# Altium PCB SIM548z v4.PcbDoc
Units mil, origin at the board's own origin, x right, y up, seen from the top; angles counter-clockwise.
Board outline 23450 x 13790 mil, 2 copper layers (Top Layer, Bottom Layer); 49 components, 0 nets, 375 pads, 39 vias.
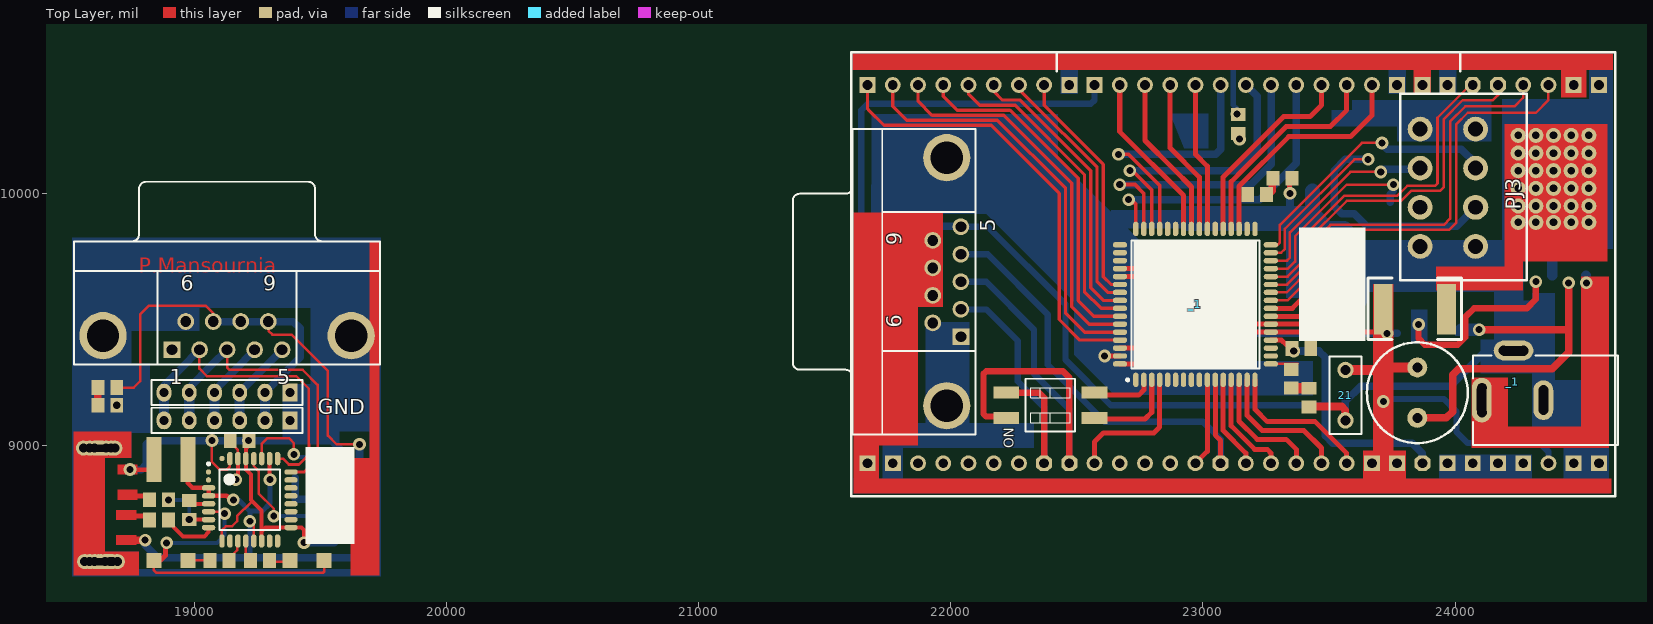
[diagram p0: Top Layer view]
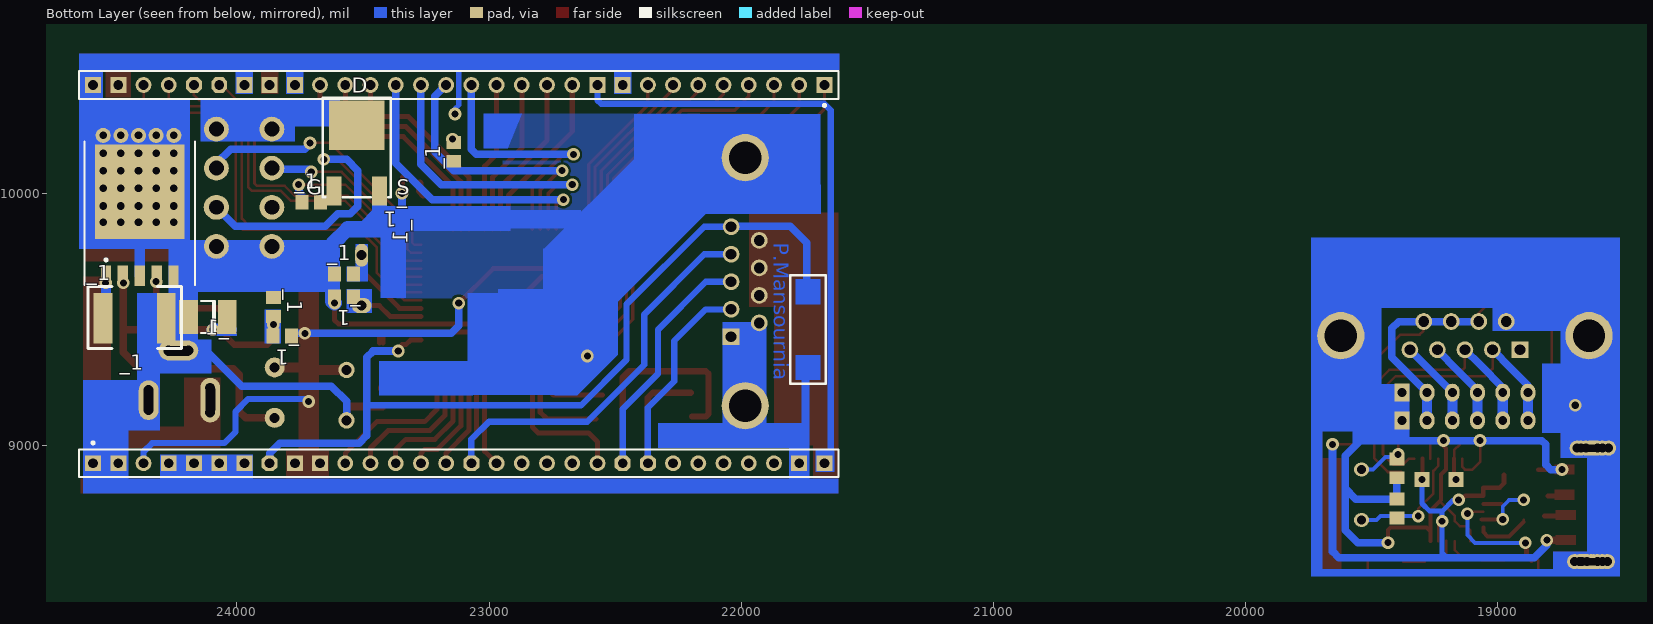
[diagram p1: Bottom Layer view, seen from below]

## Layer stack, top to bottom
Top Layer: signal copper 1.4
Dielectric: dielectric 12.6, FR-4, Dk 4.8
Bottom Layer: signal copper 1.4

## Board outline
8200,14815 31650,14815 31650,1055 31620,1025 31510,1135 8230,1135

## Design rules (kind name [scope] priority, off if disabled: settings)
Clearance [All] p1: gap=10
PolygonConnect [All] p1: connectstyle=Relief reliefconductorwidth=10 reliefentries=4 polygonreliefangle="90 Angle"
RoutingVias [All] p1: holewidth=28 width=50 viastyle="Through Hole" minholewidth=28 minwidth=50 maxholewidth=28 maxwidth=50
SilkscreenOverComponentPads [All] p1: minsilkscreentomaskgap=10
SolderMaskExpansion [All] p1: expansion=4
Width [All] p1: maxlimit=10 minlimit=10 preferedwidth=10
27 further rules are at their usual default settings.

## Components (designator, comment, footprint, x,y, rotation, side; value= is the part's Value field where it differs from the comment)
21 "Comment" VP45-3.2 23565,9200 r90 top
_1 "Comment" 2012[0805] 23820,9435 r180 bottom
_1 "Comment" 2012[0805] 23855,9550 r270 bottom
_1 "Comment" ATMEGA128 22970,9540 r90 top
_1 "Comment" KLD-0202 24645,9180 r180 top
_1 "Comment" 2220 24280,9505 r0 bottom
_1 "Comment" 1812 24115,9510 r0 bottom
_1 "Comment" 2012[0805] 23575,9680 r180 bottom
_1 "Comment" 2012[0805] 23575,9590 r180 bottom
_1 "Comment" 2012[0805] 23140,10165 r270 bottom
_1 "Comment" DPAK 23515,10210 r180 bottom
_1 "Comment" 2012[0805] 23705,9965 r0 bottom
PJ3 "PowerCon8" HDRB2*4 24081.22,10255 r270 top
? "Comment" klid_smd 21725,9485 r270 bottom
? "Comment" "dip switch" 22400,9200 r90 top
? "Comment" PROG 19410,9100 r180 top
? "Comment" PROG 19410,9210 r180 top
? "Comment" DSUB1.385-2H9 19130,9810 r0 top
? "Comment" 2012[0805] 23420,9190 r90 top
? "Comment" 2012[0805] 23350,9265 r90 top
? "Comment" LM2576 24385,9840 r180 bottom
? "Comment" HDR1X30#1 21670,10430 r0 bottom
? "Comment" 100uH 23850,9210 r90 top
? "Comment" 2220 23965,9540 r180 top
? "Comment" 2012[0805] 23390,9385 r0 top
? "Comment" X2P 23505,9655 r270 top
? "Comment" 2012[0805] 23140,10275 r90 top
? "Comment" DSUB1.385-2H9 21610,9650 r90 top
? "Comment" HDR1X30#2 24570,8930 r180 bottom
? "Comment" 2012[0805] 23215,9995 r180 top
? "Comment" 2012[0805] 23315,10060 r180 top
? "" 32A_L 19220,8785 r0 top
? "" 2012[0805] 18860,8785 r0 top
? "" 2012[0805] 18860,8705 r0 top
? "" 2012[0805] 18980,8745 r90 top
? "" 2012[0805] 19180,9020 r0 top
? "" RAD-0.2 19540,8805 r270 top
? "" 1206 18840,8545 r0 top
? "" 1206 19380,8545 r0 top
? "" 2012[0805] 19100,8545 r0 top
? "" 2012[0805] 19260,8545 r0 top
? "" 1206 18840,8885 r0 top
? "" 1206 18840,8945 r0 top
? "" 1206 18840,9005 r0 top
? "" 1206 19165,8865 r0 bottom
? "" 2012[0805] 19400,8910 r270 bottom
? "" 2012[0805] 19400,8750 r270 bottom
? "Comment" 2012[0805] 18655,9160 r0 top
? "Comment" 2012[0805] 18655,9230 r0 top

## Footprints (in the part's own frame and the unit in brackets; to place one, negate y for a bottom-side part, rotate by r counter-clockwise, add the part's x,y. Pads: shape width x height; smd on the part's side, far side on the other; paste and mask are expansions set on the pad)
32A_L [mm] "Thin QFP, 32-Leads, Body 7x7mm, Pitch 0.8mm, IPC High Density"
  oval 0.508x0.55 smd: 1(-4.15,2.8) 2(-4.15,2)
  oval 1.35x0.55 smd: 3(-4.15,1.2) 4(-4.15,0.4) 5(-4.15,-0.4) 6(-4.15,-1.2) 7(-4.15,-2) 8(-4.15,-2.8) 17(4.15,-2.8) 18(4.15,-2) 19(4.15,-1.2) 20(4.15,-0.4) 21(4.15,0.4) 22(4.15,1.2) 23(4.15,2) 24(4.15,2.8)
  oval 0.55x1.35 smd: 9(-2.8,-4.15) 10(-2,-4.15) 11(-1.2,-4.15) 12(-0.4,-4.15) 13(0.4,-4.15) 14(1.2,-4.15) 15(2,-4.15) 16(2.8,-4.15) 25(2.8,4.15) 26(2,4.15) 27(1.2,4.15) 28(0.4,4.15) 29(-0.4,4.15) 30(-1.2,4.15) 31(-2,4.15)
  oval 0.55x0.508 smd: 32(-2.8,4.15)
  silkscreen extent -4.27,-3.05 3.05,3.75, body extent -3.5,-3.5 3.5,3.5, height 1.2
100uH [mm]
  round 2 hole 1: 2(2.54,0) VCC(-2.54,0)
  silkscreen extent -5.08,-5.08 5.08,5.08
1206 [mil]
  rect 60x60 smd: 1(0,0) 2(135,0)
1812 [mm] "Chip Capacitor; Body 4.5 x 3.2 mm (LxW typ)"
  rect 1.9x3.4 smd: 1(-1.95,0) 2(1.95,0)
  silkscreen extent -0.7,-1.6 0.7,1.6
2012[0805] [mm] "Chip Resistor; Body 2.0 x 1.3 mm (LxW typ)"
  rect 1.3x1.5 smd: 1(-0.95,0) 2(0.95,0)
2220 [mil]
  rect 75x200 smd: GND(0,0) VCC(250,0)
  silkscreen extent -60,-125 310,120
ATMEGA128 [mm] "mega128-64"
  oval 1.45x0.55 smd: 1PIN(-7.092,6) 2(-7.092,5.2) 3(-7.092,4.4) 4(-7.092,3.6) 5(-7.092,2.8) 6(-7.092,2) 7(-7.092,1.2) 8(-7.092,0.4) 9(-7.092,-0.4) 10(-7.092,-1.2) 11(-7.092,-2) 12(-7.092,-2.8) 13(-7.092,-3.6) 14(-7.092,-4.4) 15(-7.092,-5.2) 16(-7.092,-6) 33(8.108,-6) 34(8.108,-5.2) 35(8.108,-4.4) 36(8.108,-3.6) 37(8.108,-2.8) 38(8.108,-2) 39(8.108,-1.2) 40(8.108,-0.4) 41(8.108,0.4) 42(8.108,1.2) 43(8.108,2) 44(8.108,2.8) 45(8.108,3.6) 46(8.108,4.4) 47(8.108,5.2) 48(8.108,6)
  oval 0.55x1.45 smd: 17(-5.492,-7.6) 18(-4.692,-7.6) 19(-3.892,-7.6) 20RST(-3.092,-7.6) 21VCC(-2.292,-7.6) 22GND(-1.492,-7.6) 23XTALL(-0.692,-7.6) 24XTALL(0.108,-7.6) 25(0.908,-7.6) 26(1.708,-7.6) 27(2.508,-7.6) 28(3.308,-7.6) 29(4.108,-7.6) 30(4.908,-7.6) 31(5.708,-7.6) 32(6.508,-7.6) 49(6.508,7.6) 50(5.708,7.6) 51(4.908,7.6) 52VCC(4.108,7.6) 53GND(3.308,7.6) 54(2.508,7.6) 55(1.708,7.6) 56(0.908,7.6) 57(0.108,7.6) 58(-0.692,7.6) 59(-1.492,7.6) 60(-2.292,7.6) 61(-3.092,7.6) 62AREF(-3.892,7.6) 63GND(-4.692,7.6) 64AVCC(-5.492,7.6)
  silkscreen extent -7.22,-6.45 6.96,6.95, body extent -6.49,-7 7.51,7, height 1.2
"dip switch" [mm]
  rect 1.2x2.6 smd: 1(-2.286,-4.323) 2(0.254,-4.323) 5(0.254,4.577) 6(-2.286,4.577)
  silkscreen extent -3.69,-2.37 1.65,2.63
DPAK [mil]
  rect 60x116 smd: 1(-100,-200) 3(80,-200)
  rect 220x196 smd: 2(-10,60)
  silkscreen extent -145,-225 125,170
DSUB1.385-2H9 [mm] "Connector; D Subminiature; 9 Position; Right Angle; Pitch 1.385 mm"
  round 4.76 hole 3.26: 10(-12.495,-9.5) 11(12.495,-9.5)
  rect 1.69x1.69 hole 1.09: GND(-5.54,-10.92)
  round 1.69 hole 1.09: GND(-4.155,-8.08) RST(5.54,-10.92) RX(-2.77,-10.92) SCK(2.77,-10.92) TX(0,-10.92) VCC(-1.385,-8.08) VCC(1.385,-8.08) VCC(4.155,-8.08)
  silkscreen extent -15.4,-12.4 15.4,6
HDR1X30#1 [mm] "Connector; Header; 30 Position"
  rect 1.6x1.6 hole 0.99: ADC0(0,0) GND(20.32,0) GND(53.34,0) GND(58.42,0) GND(73.66,0) VCC(22.86,0) VCC(55.88,0) VCC(71.12,0)
  round 1.6 hole 0.99: ADC1(2.54,0) ADC2(5.08,0) ADC3(7.62,0) ADC4(10.16,0) ADC5(12.7,0) ADC6(15.24,0) ADC7(17.78,0) PA.3(43.18,0) PA.4(40.64,0) PA.5(38.1,0) PA.6(35.56,0) PC0(50.8,0) PC1(48.26,0) PC2(45.72,0) PC4(33.02,0) PC5(30.48,0) PC6(27.94,0) PC7(25.4,0) SCL(68.58,0) SDA(66.04,0)
  oct 1.6x1.6 hole 0.99: RXD(63.5,0) TXD(60.96,0)
  silkscreen extent -1.4,-1.4 75.06,2.17
HDR1X30#2 [mm] "Connector; Header; 30 Position"
  round 1.6 hole 0.99: CTS(43.18,0) DCD(60.96,0) DSR(58.42,0) DTR(68.58,0) LED-POWER(5.08,0) MISO(33.02,0) MOSI(35.56,0) OC1B(25.4,0) OCO(30.48,0) OCR1A(27.94,0) RING(45.72,0) RTS(63.5,0) RXD(48.26,0) SS(40.64,0) TXD(66.04,0) XCK(50.8,0)
  rect 1.6x1.6 hole 0.99: GND(0,0) GND(2.54,0) GND(7.62,0) GND(10.16,0) GND(12.7,0) GND(15.24,0) GND(71.12,0) VCC(20.32,0) VCC(22.86,0) VCC(73.66,0)
  oct 1.6x1.6 hole 0.99: RST(17.78,0) RX(55.88,0) SCK(38.1,0) TX(53.34,0)
  silkscreen extent -1.4,-1.4 75.06,2.17
HDRB2*4 [mm]
  round 2.5 hole 1.5: 1(0,-5.588) 2(0,0) 3(3.937,-5.588) 4(3.937,0) 5(7.874,-5.588) 7(11.811,-5.588) 8(11.811,0)
  oval 2.5x2.55 hole 1.5: 6(7.874,0)
  silkscreen extent -3.56,-7.57 15.24,5.16
KLD-0202 [mm] "DC Power Jack, 2.5mm, KLD Series, PCB Mount"
  oval 2x4.5 all layers, no hole: 1(13.7,0)
  round 1.5 hole 1: 1A(13.7,-1.25) 1B(13.7,1.25) 2A(7.5,-1) 2B(7.5,1) 3A(9.5,-5) 3B(11.5,-5)
  oval 2x4 all layers, no hole: 2(7.5,0)
  oval 4x2 all layers, no hole: 3(10.5,-5)
  silkscreen extent 0,-4.5 14.6,4.5
klid_smd [mil]
  Top Layer region: -175,40 -75,40 -75,-60 -175,-60
  Top Layer region: 125,40 225,40 225,-60 125,-60
  silkscreen extent -190,-80 240,60
LM2576 [mm]
  rect 1.05x2.1 smd: 1(-3.4,-4.225) 2(-1.7,-4.225) 3(0,-4.225) 4(1.7,-4.225) 5(3.4,-4.225)
  rect 9x9.5 smd: 6(0,4.225)
  silkscreen extent -5.55,-5.17 5.55,9.28
PROG [mm] "Programer"
  rect 1.5x1.8 hole 0.9: GND(0.762,0)
  oval 1.5x1.8 hole 0.9: MISO(10.922,0) RST(5.842,0) SCK(8.382,0) VCC(3.302,0)
  oval 1.5x1.8 hole 0.9 mask+0.102: MOSI(13.462,0)
  silkscreen extent -0.51,-1.27 14.73,1.27
RAD-0.2 [mil] "Jumper Wire; 2 Leads"
  oval 55x60 hole 35.43: 1(-100,0) 2(100,0)
  silkscreen extent -175,-75 175,75
VP45-3.2 [mm] "Capacitor, Ceramic, Thru-Hole, Dipped Radial; Body 7.8 x 3.2 mm (WxT) Pin Spacing 5.08 mm (typ)"
  round 1.65 hole 1: GND(-2.54,0) VDD(2.54,0)
  silkscreen extent -3.9,-1.6 3.9,1.6
X2P [mm]
  oval 2.3x1.3 hole 1: 1(-2.54,0)
  oval 1.5x2 hole 1: 2(2.54,0)
  silkscreen extent -5.21,-2.03 5.21,2.03

## Free pads (board coordinates)
  round 60 hole 30: 0(18625,8990) 0(24250,9885) 0(24250,9950) 0(24250,10020) 0(24250,10090) 0(24250,10160) 0(24250,10230) 1(18615,8990) 1(24320,9885) 1(24320,9950) 1(24320,10020) 1(24320,10090) 1(24320,10160) 1(24320,10230) 2(18635,8990) 2(24390,9885) 2(24390,9950) 2(24390,10020) 2(24390,10090) 2(24390,10160) 2(24390,10230) 3(18620,8540) 3(24460,9885) 3(24460,9950) 3(24460,10020) 3(24460,10090) 3(24460,10160) 3(24460,10230) 4(18630,8540) 4(24530,9885) 4(24530,9950) 4(24530,10020) 4(24530,10090) 4(24530,10160) 4(24530,10230) 5(18655,8540)
  round 60 hole 35.43: 1(18560,8990) 2(18585,8990) 3(18605,8990) 4(18650,8990) 5(18670,8990) 6(18685,8990) 7(18565,8540) 8(18585,8540) 9(18605,8540) 10(18645,8540) 11(18665,8540) 12(18675,8540) 13(18695,8540)
  round 60 hole 40: 22(24105,9145) 22(24105,9155) 22(24105,9165) 22(24105,9175) 22(24105,9180) 22(24105,9185) 22(24105,9190) 22(24105,9195) 22(24105,9200) 22(24105,9210) 22(24105,9215) 22(24105,9220) 22(24195,9375) 22(24205,9375) 22(24215,9375) 22(24225,9375) 22(24230,9375) 22(24235,9375) 22(24240,9375) 22(24245,9375) 22(24250,9375) 22(24260,9375) 22(24265,9375) 22(24270,9375) 22(24350,9145) 22(24350,9155) 22(24350,9165) 22(24350,9175) 22(24350,9180) 22(24350,9185) 22(24350,9190) 22(24350,9195) 22(24350,9200) 22(24350,9210) 22(24350,9215) 22(24350,9220)

## Via types
v1: diameter 50, hole 28, Top Layer to Bottom Layer, 26 vias
v2: diameter 50, hole 27.56, Top Layer to Bottom Layer, 13 vias

## Nets (pads, with @x,y where several pads share a name; then routed paths per layer and width w, separated by ;. In a path a pad name is that pad's centre, name@x,y a point inside that pad or via, vN(x,y) a via of type N, cw(c..) or ccw(c..) an arc to the next point about the centre after c; other vN are vias at no path point)
pads on no net: 21.GND 21.VDD ?.1 ?.2 ?.3 ?.4 ?.5 ?.6 ?.7 ?.8 ?.9 ?.10 ?.11 ?.12 ?.13 ?.14 ?.15 ?.16 ?.17 ?.18 ?.19 ?.20 ?.21 ?.22 ?.23 ?.24 ?.25 ?.26 ?.27 ?.28 ?.29 ?.30 ?.31 ?.32 ?.ADC0 ?.ADC1 ?.ADC2 ?.ADC3 ?.ADC4 ?.ADC5 ?.ADC6 ?.ADC7 ?.CTS ?.DCD ?.DSR ?.DTR ?.GND ?.LED-POWER ?.MISO ?.MOSI ?.OC1B ?.OCO ?.OCR1A ?.PA.3 ?.PA.4 ?.PA.5 ?.PA.6 ?.PC0 ?.PC1 ?.PC2 ?.PC4 ?.PC5 ?.PC6 ?.PC7 ?.RING ?.RST ?.RTS ?.RX ?.RXD ?.SCK ?.SCL ?.SDA ?.SS ?.TX ?.TXD ?.VCC ?.XCK _1.1 _1.1A _1.1B _1.1PIN _1.2 _1.2A _1.2B _1.3 _1.3A _1.3B _1.4 _1.5 _1.6 _1.7 _1.8 _1.9 _1.10 _1.11 _1.12 _1.13 _1.14 _1.15 _1.16 _1.17 _1.18 _1.19 _1.20RST _1.21VCC _1.22GND _1.23XTALL _1.24XTALL _1.25 _1.26 _1.27 _1.28 _1.29 _1.30 _1.31 _1.32 _1.33 _1.34 _1.35 _1.36 _1.37 _1.38 _1.39 _1.40 _1.41 _1.42 _1.43 _1.44 _1.45 _1.46 _1.47 _1.48 _1.49 _1.50 _1.51 _1.52VCC _1.53GND _1.54 _1.55 _1.56 _1.57 _1.58 _1.59 _1.60 _1.61 _1.62AREF _1.63GND _1.64AVCC _1.GND _1.VCC PJ3.1 PJ3.2 PJ3.3 PJ3.4 PJ3.5 PJ3.6 PJ3.7 PJ3.8
copper on no net: | length 79320.5
  Top Layer w10: 18692.4,9230 18760,9230 18785,9255 18785,9520 18820,9555 19045,9555 19075.47,9524.53 19075.47,9491.89 ; 18840,8545 18840,8505 18850,8495 19510,8495 19515,8500 19515,8545 ; 18850,8545 18865.75,8545 ; v2@18885,8600 v2@18895,8610 ; 18897.4,8696.85 18897.4,8705 ; 18975,8545 19062.6,8545 ; 19020.94,9380.08 19020,9379.13 19020,9305 19050,9275 19110,9275 19405,9275 19454.63,9225.37 19454.63,8964.63 ; 19056.61,8737.76 19112.24,8737.76 v2(19120,8730) ; v2(19070,9020) 19070,8935 19100,8905 19130,8905 19141.26,8916.26 19141.26,8948.39 ; 19109.76,8621.61 19109.76,8659.76 ; 19109.76,8645 19109.76,8664.76 19125,8680 ; 19130,9380.08 19130,9310 19140,9300 19265,9300 19430,9300 19489.25,9240.75 19489.25,8949.25 19435.24,8895.24 19383.39,8895.24 ; 19140,8555 19170,8585 19170,8620 ; 19145,8680 19125,8680 ; 19150,9005 19172.76,8982.24 19172.76,8948.39 ; 19204.25,8621.61 19204.25,8560.75 19215,8550 ; v2(19220,8700) 19235.75,8684.25 19235.75,8621.61 ; 19225,8785 19225,8800 ; 19225,8810 19225,8775 19170,8720 19170,8700 19150,8680 19125,8680 ; 19235.75,8948.39 19235.75,8919.25 19255,8900 19255,8810 19315,8750 v2(19315,8720) ; 19245,8765 19267.24,8742.76 ; 19267.24,8621.61 19267.24,8660 ; 19267.24,8948.39 19267.24,9006.5 19290,9029.25 19375,9029.25 19395,9009.25 v2(19395,8965) ; 19290,8540 19375,8540 ; 19295.47,9490 19293.58,9491.89 19295,9490.47 19295,9455 19310,9440 19355,9440 19385,9440 19530,9295 19530,9040 19565,9005 v1(19655,9005) ; 19330.24,8948.39 19351.61,8948.39 19375,8925 19415,8925 19455,8965 19455,9005 ; 21645,9800 21658.58,9813.58 ; 21923.58,9600 21928.11,9595.47 ; 21924.53,9810 21928.11,9813.58 ; 21927.64,9705 21928.11,9704.53 ; 22194.8,9115 22199.8,9110 ; v1(22705,9975) v1@22715,9975 ; 22916.77,9386.77 22920,9390 ; 23080,9260.55 23080.24,9260.79 ; 23269.21,9323.78 23270.43,9325 23375,9325 ; 23269.21,9575.75 23335.75,9575.75 23445,9685 23445,9785 23515,9855 23975,9855 24005,9885 24005,10275 24050,10320 24320,10320 24370,10370 24370,10430 ; 23269.21,9607.24 23332.24,9607.24 23425,9700 23425,9795 23505,9875 23955,9875 23980,9900 23980,10285 24040,10345 24235,10345 24270,10380 24270,10430 ; 23269.21,9638.74 23333.74,9638.74 23405,9710 23405,9805 23570,9970 23785,9970 23825,10010 23940,10010 23955,10025 23955,10295 24030,10370 24150,10370 24170,10390 24170,10430 ; 23269.21,9670.24 23335.24,9670.24 23385,9720 23385,9815 23560,9990 23770,9990 23810,10030 23920,10030 23930,10040 23930,10300 24060,10430 24070,10430 ; 23269.21,9701.73 23336.73,9701.73 23365,9730 23365,9830 23570,10035 v1(23755,10035) ; 23269.21,9733.23 23333.23,9733.23 23345,9745 23345,9845 23585,10085 v1(23705,10085) ; 23269.21,9764.72 23309.72,9764.72 23325,9780 23325,9860 23600,10135 v1(23655,10135) ; 23269.21,9796.22 23281.22,9796.22 23296.22,9796.22 23305,9805 23305,9875 23630,10200 v1(23710,10200) ; v1@23342.4,10002.6 v1(23345,10000) ; 23350,9227.6 23350.2,9227.4 ; 23420,9152.6 23422.4,9155 ; 23500,9745 23510,9755 ; 23670,10410 23670,10430 ; v1@23711.64,9449.76 v1@23711.88,9450 ; 23861.22,9945 23865,9948.78
  Top Layer w13: 21670,10430 21670,10335 21675,10330 21735,10270 22160,10270 22430,10000 22430,9500 22511.73,9418.27 22670.79,9418.27 ; 21770,10430 21770,10345 21825,10290 22185,10290 22455,10020 22455,9525 22530.24,9449.76 22670.79,9449.76 ; 21870,10430 21870,10365 21925,10310 22210,10310 22480,10040 22480,9550 22548.74,9481.26 22670.79,9481.26 ; 21970,10430 21970,10385 22025,10330 22235,10330 22505,10060 22505,9575 22567.24,9512.76 22670.79,9512.76 ; 22070,10430 22070,10395 22115,10350 22255,10350 22530,10075 22530,9610 22595.75,9544.25 22670.79,9544.25 ; 22170,10430 22170,10405 22205,10370 ; 22180,10350 22240,10350 ; 22250,10370 22205,10370 ; 22270,10430 22270,10413.28 22311.64,10371.64 22580,10103.28 22580,9650 22622.76,9607.24 22670.79,9607.24 ; 22370,10430 22370,10350 22605,10115 22605,9670 22636.26,9638.74 22670.79,9638.74 ; 22670.79,9575.75 22604.25,9575.75 22555,9625 22555,10090 22275,10370 22205,10370
  Top Layer w15: v1(22665,10155) 22705,10155 22828.27,10031.73 22828.27,9859.21 ; v1(22670,10035) 22730,10035 22765.28,9999.72 22765.28,9859.21 ; v1(22710,10090) 22720,10090 22796.77,10013.23 22796.77,9859.21 ; v1@22715,9975 22733.78,9956.22 22733.78,9859.21
  Top Layer w16: 18897.4,8696.85 18954.25,8640 19005,8640 ; v1@18980,8706.26 19063.23,8706.26 ; 18985.75,8769.25 19056.61,8769.25 ; 18990,8640 19040,8640 19056.61,8656.61 19056.61,8674.76 ; v2@19172.76,8872.76 19172.76,8948.39 ; v2@19220,9005 19204.25,8989.25 19204.25,8948.39 19204.25,8905.75 19225,8885 19225,8785 19267.24,8742.76 19267.24,8621.61 ; 19267.24,8660 19282.01,8674.76 19383.39,8674.76 19425.24,8674.76 19435,8665 v2(19435,8615) ; v2@19298.74,8881.26 19298.74,8948.39
  Top Layer w18: v2(18745,8905) 18840,8905 ; 18975,8885 18975,8850 18992.76,8832.24 19056.61,8832.24 19056.61,8800.75 19129.25,8800.75 19145,8785 v2(19155,8785)
  Top Layer w20: 18728.03,8800 18800,8800 ; 18740,8720 18815,8720 ; 18865.75,8545 18885,8564.25 v2@18885,8600 ; 22550,9200 22745,9200 22765.28,9220.28 22765.28,9260.79 ; 22570,8930 22570,9015 22605,9050 22805,9050 22828.27,9073.27 22828.27,9260.79 ; 22575,9105 22770,9105 22796.77,9131.77 22796.77,9260.79 ; v1@22605,9355.28 22670.79,9355.28 ; 22670,10430 22670,10360 22670,10245 22922.76,9992.24 22922.76,9895 ; 22670.79,9323.78 22853.78,9323.78 22979.76,9449.76 23174.76,9449.76 23269.21,9449.76 v1@23711.64,9449.76 ; 22670.79,9386.77 22916.77,9386.77 ; 22670.79,9670.24 22789.76,9670.24 22978.74,9481.26 23140,9481.26 ; 22670.79,9701.73 22983.27,9701.73 v1(23120,9565) ; 22770,10430 22770,10210 22880,10100 22954.25,10025.75 22954.25,9859.21 ; 22870,10430 22870,10205 22870,10180 22985.75,10064.25 22985.75,9859.21 ; 22922.76,9859.21 22922.76,9907.24 ; 22970,8930 23017.24,8977.24 23017.24,9260.79 ; 22970,10430 22970,10155 23017.24,10107.76 23017.24,9859.21 ; 23048.74,9260.79 23048.74,9041.26 23070,9020 23070,8930 ; 23080,9260.55 23080,9060 23170,8970 23170,8930 ; 23080.24,9859.21 23080.24,9920.24 23080.24,10065.24 23320,10305 23425,10305 23470,10350 23470,10430 ; 23111.73,9260.79 23111.73,9078.27 23205,8985 23255,8985 23270,8970 23270,8930 ; 23111.73,9859.21 23111.73,9911.73 23111.73,10046.73 23161.73,10096.73 23330,10265 23505,10265 23570,10330 23570,10430 ; 23120,9481.26 23269.21,9481.26 23373.74,9481.26 23596.26,9481.26 23612.4,9497.4 v1(23612.4,9565) ; 23143.23,9260.79 23143.23,9096.77 23215,9025 23330,9025 23370,8985 23370,8930 ; 23143.23,9859.21 23143.23,9903.23 23143.23,10028.23 23340,10225 23585,10225 23670,10310 23670,10430 ; 23174.72,9260.79 23174.72,9120.28 23235,9060 23400,9060 23470,8990 23470,8930 ; 23206.22,9260.79 23206.22,9213.78 23206.22,9143.78 23255,9095 23445,9095 23570,8970 23570,8930 ; 23269.21,9418.27 23311.73,9418.27 23330,9400 23345,9400 ; 23269.21,9512.76 23392.76,9512.76 23435,9555 23505,9555 ; 23269.21,9544.25 23354.25,9544.25 23505,9695 23505,9755 ; v1@23342.4,10002.6 23342.4,10065 ; 23420,9407.6 23420,9449.76 ; 23435,9407.6 23435,9449.76
  Top Layer w25: 22194.8,9115 22140,9115 22130,9125 22130,9285 22140,9295 22215,9295 22445,9295 22470,9270 22470,8930 ; 22199.8,9210 22350,9210 22370,9190 22370,8930 ; 23711.88,9213.12 23711.88,9310 ; v1(23855,9480) 23855,9425 23880,9400 24010,9400 24040,9430 24040,9510 24075,9545 24285,9545 24320,9580 v1(24320,9650)
  Top Layer w30: 18617.6,9160 18617.6,9230 ; 18720,8625 v2(18805,8625) ; v2@19430,8615 v2(19435,8615) ; 21658.58,9813.58 21928.11,9813.58 ; 21690,9705 21927.64,9705 ; 21695,9600 21923.58,9600 ; 23260,9995 23275,10010 23275,10040 ; 23422.4,9155 23550,9155 23565,9140 23565,9100 ; 23850,9110 23965,9110 23990,9135 23990,9280 24015,9305 24385,9305 24450,9370 24450,9465 24445,9460 v1(24095,9460) ; 24450,9455 v1(24450,9645) 24450,9455
  Top Layer w40: 23350.2,9227.4 23420,9227.4 ; 23560,9300 23710,9300 ; 23711.88,9540 23711.88,9310 ; 23870,10430 23870,10525 ; 24105.63,9130.79 24105.63,9074.37 24135,9045 ; 24520,9045 24520,9430 ; 24520,9375 v1(24520,9645) ; 23711.88,9310 23850,9310 23711.88,9310
  Bottom Layer w10: 18954.25,8785 18980,8759.25 ; 18965,9493.31 18966.42,9491.89 ; 19075,9491.42 19075.47,9491.89 ; 19086.89,9491.89 19184.53,9491.89 ; 21745,9310 21770,9335 ; 22038.03,9870 22039.92,9868.11 ; 22039.92,9540.94 22040.87,9540 ; 22039.92,9650 22044.92,9645 ; 22390,9920 22450,9860 22450,9870 22405,9915 22420,9915 ; 22620,9750 22670,9700 ; 22640,9740 22670,9710 ; 22870,8930 22870,8950 ; 23120,10505 23125,10510 ; 23465,9160 23485,9140 ; v1@23645,10135 v1(23655,10135) ; v1@23710,10195 v1(23710,10200) ; 23965,10520 23970,10515 ; 24105.63,9125.63 24105.63,9130.79 ; 24518.86,9571.14 24540,9550 ; 22420,9915 22425,9910 22435,9910 22440,9915 22425,9900 22425,9895 ; 22420,9915 22420,9900 22425,9895 ; 22420,9915 22440,9895 22425,9895
  Bottom Layer w15.75: v2(18890,8614.25) 19089.25,8614.25 19120,8645 v2(19120,8730) ; v1(18897.4,8785) 18954.25,8785 18980,8759.25 v1(18980,8707.6)
  Bottom Layer w16: v2(19315,8720) 19465,8720 19480,8705 19520,8705 ; v2@19400,8955 19445,8955 19495,8905 19540,8905
  Bottom Layer w20: v2(19155,8785) 19175,8785 19220,8740 ; 19185,8555 19200,8555 19220,8575 v2(19220,8700) 19220,8740 ; v2(19300,8865) 19300,8770 19270,8740 19220,8740 ; 23120,10505 23120,10350 23135,10335 v1(23135,10315)
  Bottom Layer w25: 21670,8930 21645,8955 21645,9960 21645,10330 21670,10355 22555,10355 22570,10370 22570,10430 ; 22039.92,9650 22140,9650 22330,9460 22330,9285 22470,9145 22470,8930 ; 22039.92,9759.06 22145.94,9759.06 22385,9520 22385,9320 22610,9095 22960,9095 23000,9095 23070,9025 23070,8930 ; 22039.92,9868.11 22146.89,9868.11 22455,9560 22455,9340 22635,9160 23465,9160 ; 22040.87,9540 22140,9540 22265,9415 22265,9255 22370,9150 22370,8930 ; v1(23715,9175) 23725,9185 23955,9185 24005,9135 24005,9055 24050,9010 24335,9010 24370,8975 24370,8930
  Bottom Layer w30: v2(18745,8905) 18790,8905 18810,8925 18810,9005 18825,9020 19545,9020 19605,8960 19605,8830 19562.4,8787.4 19400,8787.4 19400,8872.6 ; v2(18805,8625) 18805,8605 18855,8555 19630,8555 19655,8580 v1(19655,9005) ; 18880,9210 18880,9239.13 18945.87,9305 19020,9379.13 19020.94,9380.08 ; 18980,9210 18980,9230 19070,9320 19070,9320.08 19130,9380.08 ; 19075.47,9491.89 19393.11,9491.89 19420,9465 19420,9350 19280,9210 ; 19085,9224.13 19155.87,9295 19240,9379.13 19239.06,9380.08 ; 19180,9211.97 19233.03,9265 19345,9376.97 19348.11,9380.08 ; v2(19435,8615) 19555,8615 19605,8665 19605,8845 ; 21740,9625 21740,9805 21805,9870 22038.03,9870 ; 21745,9070 21745,9310 ; v1(22665,10155) 23050,10155 23070,10175 23070,10430 ; v1(22670,10035) 23190,10035 23270,10115 23270,10430 ; v1(22705,9975) 23225,9975 23370,10120 23370,10430 ; v1(22710,10090) 23140,10090 23215,10165 23215,10385 23170,10430 ; v1(23120,9565) 23120,9475 23150,9445 23770,9445 ; 23345,9945 v1(23345,10000) ; v1(23360,9375) 23460,9375 23485,9350 23485,9040 23515,9010 23830,9010 23870,8970 23870,8930 ; 23565,9100 23565,9175 23625,9235 23980,9235 24121.85,9376.85 24270.98,9376.85 ; v1(23655,10135) 23565,10135 23520,10090 23520,9950 23550,9920 23600,9920 23650,9870 24006.22,9870 24081.22,9945 ; v1(23705,10085) 23715,10095 23861.22,10095 ; v1@23710,10195 23730,10175 24025,10175 24081.22,10118.78 24081.22,10100 ; 23742.4,9965 23742.4,9997.4 23755,10010 v1(23755,10035)
  Bottom Layer w40: 18880,9100 18880,9210 ; 18980,9100 18980,9210 ; 19080,9100 19080,9210 19085,9215 19085,9224.13 ; 19180,9100 19180,9210 19180,9211.97 ; 19280,9100 19280,9210 ; 19380,9100 19380,9210 ; 22470,10430 22470,10475 22470,10520 ; v1(23612.4,9565) 23612.4,9680 ; 23770,10430 23770,10510 ; 23970,10430 23970,10515 ; 24251.14,9380 24251.14,9673.66 24251.14,9961.14 ; 24280,9505 24280,9410 24310,9380 24349.72,9340.28 24349.72,9140.63 ; 24385,9673.66 24385,9865 ; 24518.86,9571.14 24518.86,9673.66
  Bottom Layer w50: 18600,9185 18600,9235 18600,9440 ; 18688.07,9650.98 18905.98,9650.98 ; 18965,9493.31 18965,9660 ; 19380,9210 19575,9210 19621.93,9256.93 19621.93,9435.98 ; 21928.11,9486.42 21984.02,9430.51 21984.02,9158.07 ; 24025,9460 v1(24095,9460) ; 24105.63,9125.63 24105.63,9229.21 24105.63,9194.37
  Bottom Layer w60: 21650,8840 24570,8840 24570,8930 ; 23435,10010 23435,9920 23495,9860 23560,9860 23620,9800 23620,9572.6 v1(23612.4,9565)
  other v1: 18692.4,9160 22610,9355.28 23730,9445 23145,10215
  other v2: 19165,8865 19215,9020

## Polygon pours and split planes (outlines as drawn)
no net on Bottom Layer "Top Layer-No Net" (solid, pour order 11): 22660,9910 23365,9910 23365,9585 22740,9585 22680,9585 22670,9595 22670,9685 22670,9710 22650,9730 22640,9740 22640,9910
no net on Bottom Layer "Top Layer-No Net" (solid, pour order 14): 22435.2,9918.01 22435.2,9853.01 22435.2,9843.01 22525.2,9843.01 22525.2,9793.01 22530.2,9788.01 22570.2,9788.01 22615.2,9743.01 22660.2,9743.01
no net on Bottom Layer "Top Layer-No Net" (solid, pour order 16): 22165,10315 22775,10315 22870,10315 22875,10310 22945,10240 22945,9915 22375,9915 22345,9945 22210,10080 22160,10080

## Other copper
Top Layer:
  rectangle: 21695,9000 21870,9560
  rectangle: 21615,9550 21970,9925
  rectangle: 24065,9035 24210,9270
  rectangle: 23925,9615 24125,9710
  rectangle: 24195,9730 24605,10275
  rectangle: 24125,9615 24270,9710
  rectangle: 24195,9615 24270,9950
  rectangle: 23675,8910 23755,9640
  rectangle: 23675,8890 23750,9170
  rectangle: 21615,8810 24620,8870
  rectangle: 23635,8810 23805,8980
  rectangle: 24065,8990 24540,9075
  rectangle: 21615,8815 21715,9830
  rectangle: 21610,10490 24625,10555
  rectangle: 24420,10380 24520,10525
  rectangle: 24500,8990 24610,9670
  rectangle: 23835,10395 23905,10540
  rectangle: 18520,8950 18750,9055
  rectangle: 18520,8485 18645,9055
  rectangle: 18520,8485 18780,8580
  rectangle: 18695,8885 18775,8925
  rectangle: 18695,8785 18775,8825
  rectangle: 18690,8705 18770,8745
  rectangle: 18690,8605 18770,8645
  rectangle: 19620,8485 19735,8950
  rectangle: 19695,8950 19735,9810
  text "P.Mansournia" at 18780,9685 h60
Bottom Layer:
  rectangle: 21630,8895 21705,8985
  rectangle: 18515,9050 18825,9140
  rectangle: 18515,9050 18825,9325
  rectangle: 19350,9055 19530,9245
  rectangle: 18715,9455 19020,9605
  rectangle: 18515,9310 18750,9580
  rectangle: 19460,9055 19740,9545
  rectangle: 18515,9545 19740,9825
  rectangle: 22850,9290 23085,9605
  region: 22330,8990 22330,9090 21730,9090 21730,8990
  rectangle: 23935,8820 24305,8965
  rectangle: 23825,9405 23890,9540
  rectangle: 24185,10295 24560,10375
  rectangle: 24100,9285 24385,9420
  rectangle: 23465,9525 23565,9620
  rectangle: 23530,9650 23565,9710
  rectangle: 23480,9650 23530,9800
  rectangle: 23830,9410 23855,9515
  rectangle: 24430,8895 24610,9260
  rectangle: 24305,9060 24470,9260
  rectangle: 24155,9440 24300,9575
  rectangle: 24210,10145 24565,10325
  rectangle: 24185,9780 24590,10335
  rectangle: 24155,9360 24315,9575
  rectangle: 24305,9180 24395,9605
  rectangle: 24430,8810 24610,8960
  rectangle: 21615,8810 21675,8870
  rectangle: 21730,8840 21810,9075
  rectangle: 21610,10490 24625,10555
  rectangle: 24530,9780 24625,10555
  rectangle: 23605,9610 24270,9815
  rectangle: 24155,9525 24245,9685
  rectangle: 23510,10265 24145,10330
  rectangle: 23590,10285 24145,10370
  rectangle: 23770,10205 23915,10335
  rectangle: 23915,10205 24145,10285
  rectangle: 24000,9435 24045,9445
  rectangle: 24185,9680 24255,9885
  rectangle: 23475,9825 23490,9835
  rectangle: 23470,9825 23560,9860
  rectangle: 23935,10395 24005,10535
  rectangle: 23735,10395 23805,10530
  rectangle: 22435,10395 22505,10525
  rectangle: 23365,9825 23480,9910
  rectangle: 23330,9585 23430,9865
  rectangle: 22635,9860 22945,9935
  rectangle: 22915,9850 23435,9950
  rectangle: 22545,9795 22615,9855
  rectangle: 22600,9845 22615,9855
  rectangle: 22525,9793.46 22600,9845
  rectangle: 22575,9790 22630,9855
  rectangle: 22625,9740 22650,9840
  rectangle: 22635,9740 22670,9860
  rectangle: 22430,9840 22650,9925
  rectangle: 21685,10035 22425,10315
  rectangle: 21930,10080 22200,10315
  rectangle: 22670,9240 22725,9250
  rectangle: 22684.82,9235.18 22686.73,9239.8
  rectangle: 22686.73,9239.8 22725,9240
  rectangle: 22670,9200 23065,9335
  rectangle: 22670,9250 22965,9620
  rectangle: 21900,9065 22075,9490
  rectangle: 18515,8950 18750,9075
  rectangle: 18515,8485 18645,8955
  rectangle: 18645,8485 18780,8580
  rectangle: 19350,9010 19575,9145
  rectangle: 19695,8480 19740,9060
  region: 19740,8480 19740,8510 18515,8510 18515,8480
  region: 21685,10035 21685,9920 22140,9920 22490,9570 22490,9360 22650,9200 22740,9200 22785,9245 22785,9780 22780,9780 22425,10135
  region: 22870,10315 23020,10315 23020,10180 22925,10180
  region: 23065,9335 23435,9335 23435,9200 23065,9200
  text "P.Mansournia" at 21870,9805 h60 r90

## Silkscreen, mask and mechanical layers (free items; w line width, h text height)
Top Overlay:
  rectangle: 23380,9415 23645,9865
  rectangle: 22725,9305 23215,9813.94
  rectangle: 19440,8610 19635,8995
  lines w10: 22420,10485 22420,10560 24020,10560 24020,10485 ; 21605,8800 21605,8920 21605,10455 21605,10560 24635,10560 24635,8800 21605,8800
  text "GND" at 19490,9125 h60
Bottom Overlay:
Bottom Paste:
  rectangle: 21685,9260 21790,9365
  rectangle: 21685,9560 21785,9655
Bottom Solder:
  lines w10: 18510,8475 19740,8475 19740,9825 18510,9825 18510,8475

## Text inside footprints (layer, text, board x,y; h text height)
_1: Bottom Overlay "D" at 23545,10400 h60; Bottom Overlay "G" at 23725,9995 h60; Bottom Overlay "S" at 23365,9995 h60
?: Top Overlay "ON" at 22250.2,8990 h39.37 r90
?: Top Overlay "1" at 18902.05,9244.06 h59.06; Top Overlay "5" at 19328.43,9244.06 h59.06; Top Overlay "9" at 19273.9,9614.13 h59.06; Top Overlay "6" at 18946.73,9614.13 h59.06
?: Top Overlay "5" at 22175.94,9848.43 h59.06 r90; Top Overlay "9" at 21805.87,9793.9 h59.06 r90; Top Overlay "6" at 21805.87,9466.73 h59.06 r90